# EAGLE board UI Board (EAGLE 7.5.0)
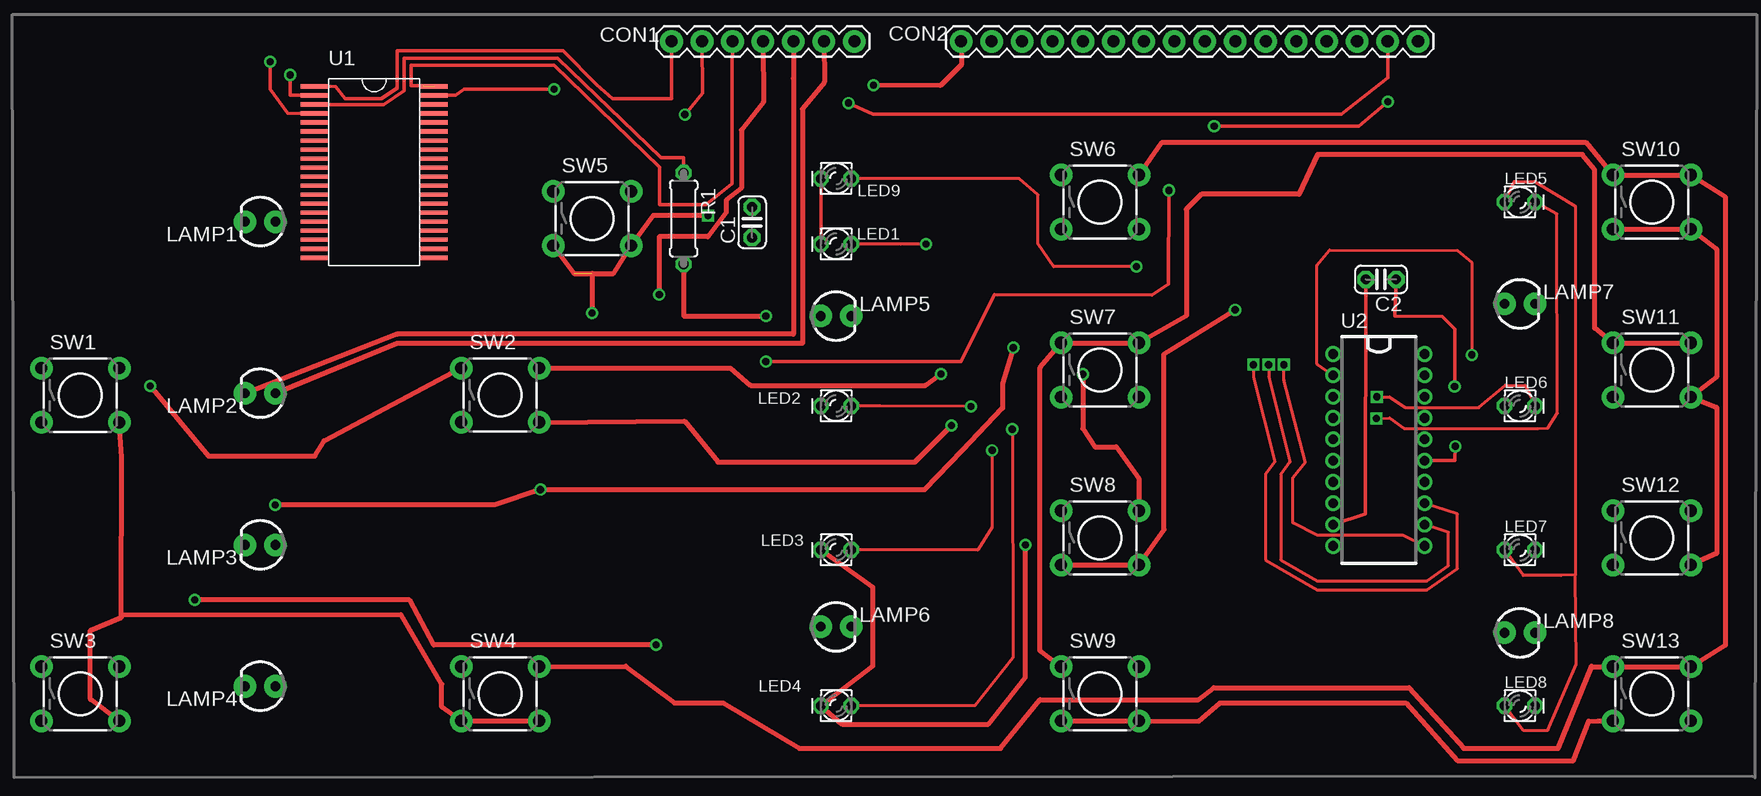
[diagram p0: board, top side]
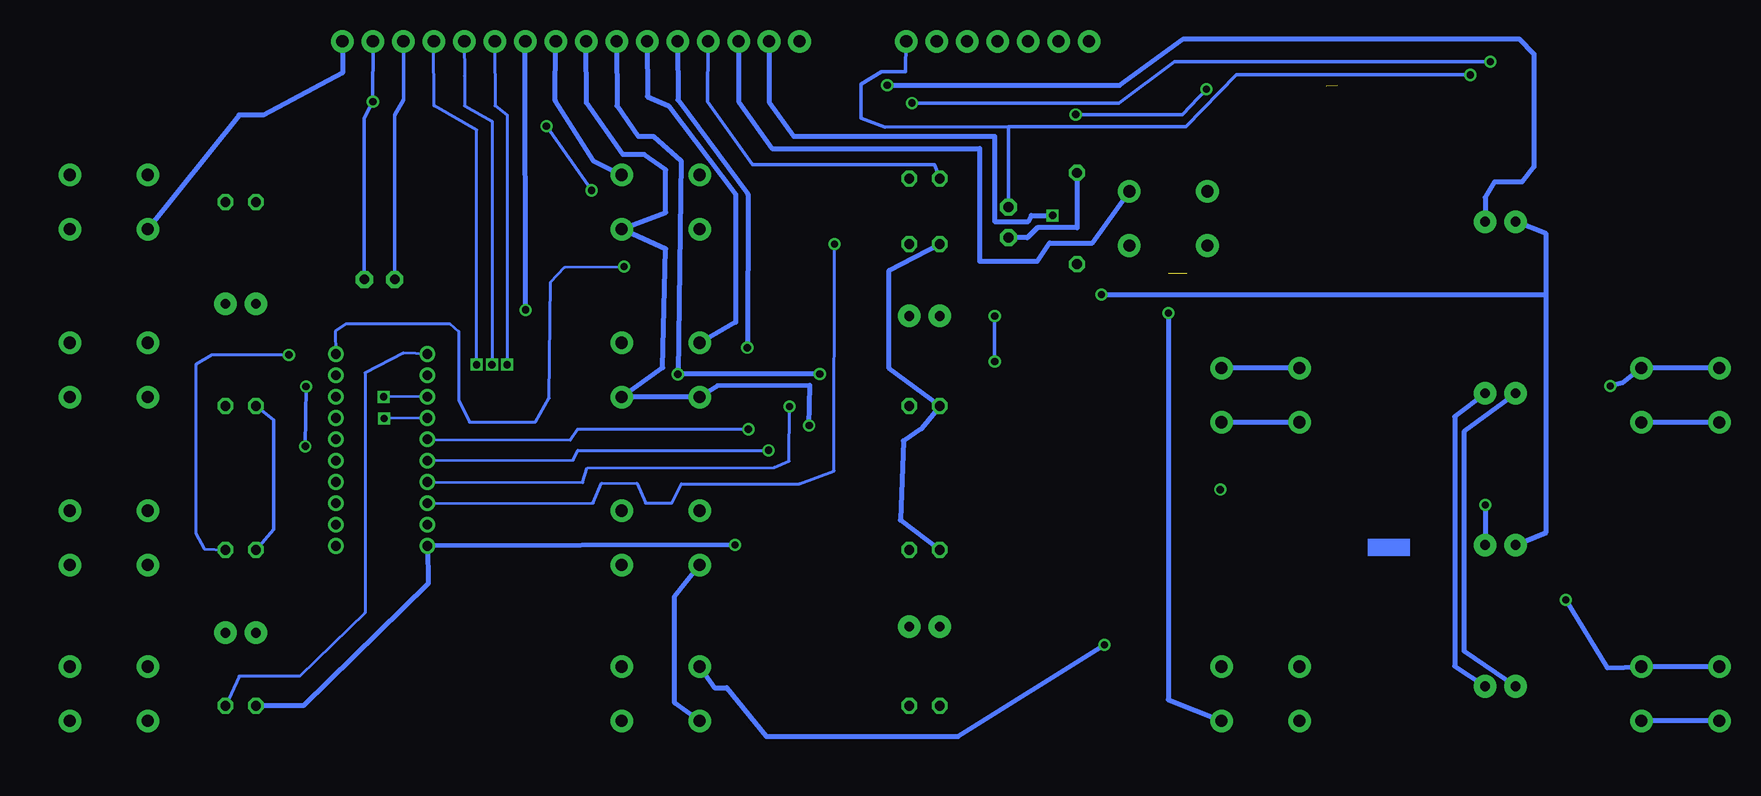
[diagram p1: board, bottom side, seen from below]

No outline drawn. Coordinates in mm, seen from the top.
Copper layers (1*16): Top 0.035mm / dielectric 1.5mm / Bottom 0.035mm
Design rules "default": minimum track width 10mil, minimum drill 24mil, track to track 8mil, track to pad 8mil, pad to pad 8mil, via to via 8mil, smd to smd 8mil, copper to edge 40mil, drill to drill 8mil, minimum pad ring 10mil, minimum via ring 8mil, stop-mask expansion 4mil, vias tented up to drill 0mil, thermal gap 10mil

## Footprints (pad centres in the part's own frame; a part is rotated, then mirrored left to right if it is on the bottom)
C025-024X044 = drill 0.813 pad 1.422 octagon: 1 -1.27,0; 2 1.27,0
1X07 = drill 1.016 pad 1.88: 1 0,0; 2 2.54,0; 3 5.08,0; 4 7.62,0; 5 10.16,0; 6 12.7,0; 7 15.24,0
1X16 = drill 1.016 pad 1.88: 1 0,0; 2 2.54,0; 3 5.08,0; 4 7.62,0; 5 10.16,0; 6 12.7,0; 7 15.24,0; 8 17.78,0; 9 20.32,0; 10 22.86,0; 11 25.4,0; 12 27.94,0; 13 30.48,0; 14 33.02,0; 15 35.56,0; 16 38.1,0
LED3MM = drill 0.813 pad 1.88: A -1.27,0; K 1.27,0
LED_LD260 = drill 0.813 octagon: A -1.27,0; K 1.27,0
LD260 = drill 0.813 octagon: A -1.27,0; K 1.27,0
0207/7 = drill 0.813 octagon: 1 -3.81,0; 2 3.81,0
TACTILE-PTH = drill 1.016 pad 1.88: 1 -3.251,2.261; 2 3.251,2.261; 3 -3.251,-2.261; 4 3.251,-2.261
SOT158-1 = smd 2.25 x 0.35: P1 -5,7.144; P2 -5,6.392; P3 -5,5.64; P4 -5,4.888; P5 -5,4.136; P6 -5,3.384; P7 -5,2.632; P8 -5,1.88; P9 -5,1.128; P10 -5,0.376; P11 -5,-0.376; P12 -5,-1.128; P13 -5,-1.88; P14 -5,-2.632; P15 -5,-3.384; P16 -5,-4.136; P17 -5,-4.888; P18 -5,-5.64; P19 -5,-6.392; P20 -5,-7.144; P21 5,-7.144; P22 5,-6.392; P23 5,-5.64; P24 5,-4.888; P25 5,-4.136; P26 5,-3.384; P27 5,-2.632; P28 5,-1.88; P29 5,-1.128; P30 5,-0.376; P31 5,0.376; P32 5,1.128; P33 5,1.88; P34 5,2.632; P35 5,3.384; P36 5,4.136; P37 5,4.888; P38 5,5.64; P39 5,6.392; P40 5,7.144
PRDP0020BA-A = drill 0.8 pad 1.27: 1 -8.001,-3.81; 2 -6.223,-3.81; 3 -4.445,-3.81; 4 -2.667,-3.81; 5 -0.889,-3.81; 6 0.889,-3.81; 7 2.667,-3.81; 8 4.445,-3.81; 9 6.223,-3.81; 10 8.001,-3.81; 11 8.001,3.81; 12 6.223,3.81; 13 4.445,3.81; 14 2.667,3.81; 15 0.889,3.81; 16 -0.889,3.81; 17 -2.667,3.81; 18 -4.445,3.81; 19 -6.223,3.81; 20 -8.001,3.81

## Placement (x,y rotation side)
C1  1.5nF  [C025-024X044]  -6.78,15.09 90 top
C2  1.5nF  [C025-024X044]  45.64,10.34 180 top
CON1  [1X07]  -13.49,30.2 0 top
CON2  [1X16]  10.64,30.2 0 top
LAMP1  LCD Temp  [LED3MM]  -47.78,15.15 180 top
LAMP2  LIGHT  [LED3MM]  -47.78,0.84 180 top
LAMP3  LCD SPEED  [LED3MM]  -47.78,-11.8 180 top
LAMP4  LIGHT  [LED3MM]  -47.78,-23.59 180 top
LAMP5  LIGHT  [LED3MM]  0.22,7.29 0 top
LAMP6  LIGHT  [LED3MM]  0.22,-18.62 0 top
LAMP7  LIGHT  [LED3MM]  57.22,8.31 0 top
LAMP8  LIGHT  [LED3MM]  57.22,-19.12 0 top
LED1  Auto  [LED_LD260]  0.22,13.29 180 top
LED2  Econ  [LD260]  0.22,-0.21 180 top
LED3  On / Off  [LD260]  0.22,-12.21 180 top
LED4  Off  [LD260]  0.22,-25.21 180 top
LED5  Windsh  [LD260]  57.22,16.79 0 top
LED6  Front  [LED_LD260]  57.22,-0.21 0 top
LED7  Front/Feet  [LD260]  57.22,-12.21 0 top
LED8  Feet  [LD260]  57.22,-25.21 0 top
LED9  On  [LD260]  0.22,18.75 180 top
R1  1M  [0207/7]  -12.49,15.42 270 top
SW1  < Temp  [TACTILE-PTH]  -62.78,0.68 0 top
SW2  Temp >  [TACTILE-PTH]  -27.78,0.69 0 top
SW3  < SPEED  [TACTILE-PTH]  -62.78,-24.21 0 top
SW4  SPEED >  [TACTILE-PTH]  -27.78,-24.21 0 top
SW5  Ext.  [TACTILE-PTH]  -20.11,15.42 0 top
SW6  Auto  [TACTILE-PTH]  22.22,16.79 0 top
SW7  Eco  [TACTILE-PTH]  22.22,2.79 0 top
SW8  Rec  [TACTILE-PTH]  22.22,-11.21 0 top
SW9  On/Off  [TACTILE-PTH]  22.22,-24.21 0 top
SW10  WindSh.  [TACTILE-PTH]  68.22,16.79 0 top
SW11  Front  [TACTILE-PTH]  68.22,2.79 0 top
SW12  Front+Feet  [TACTILE-PTH]  68.22,-11.21 0 top
SW13  Feet  [TACTILE-PTH]  68.22,-24.21 0 top
U1  PCF2112CT  [SOT158-1]  -38.28,19.29 0 top
U2  MM5481N  [PRDP0020BA-A]  45.46,-3.88 270 top

## Library data of the parts
C1 C2 LED2-LED5 LED7-LED9 R1 = adafruit
CON1 CON2 = SparkFun-Connectors
LAMP1-LAMP8 = SparkFun-LED
LED1 LED6 = eagle-ltspice
SW1-SW13 = SparkFun-Electromechanical
U1 = SOT185-1
U2 = micro-renesas

## Nets
CON3.1(GN)-(LUZ_PPL_V+): CON1.5 LAMP2.K LAMP4.K
CON3.1(GN)-T3.COLLECTOR-MM5481.BRIGHT_CONTROL(LUZ_PPL_V+): C2.2 CON2.14 U2.9
CON5.4(MN)-LUZ_PPL_V-: CON1.6 LAMP2.A LAMP4.A
CON5.11(NZ)-L4947PD(U2).GND: C2.1 CON2.15 R1.2 U1.P4 U2.15
L4947PD(U2).VOUT(+5V): CON2.4 LED1.K LED2.K LED3.K LED4.K LED5.A LED6.A LED7.A LED8.A LED9.K U2.10
LUZ_LCD_V+: CON1.4 LAMP1.K LAMP3.K
MM5481.LED1: LED1.A U2.8
MM5481.LED2: LED2.A U2.7
MM5481.LED3: LED3.A U2.6
MM5481.LED4: LED4.A U2.5
MM5481.LED5: LED5.K U2.4
MM5481.LED6: LED6.K U2.3
MM5481.LED7: LED7.K U2.2
MM5481.LED8: LED8.K U2.1
MM5481.LED9: LED9.A U2.20
PA0-SW1: CON2.2 SW1.3 SW1.4 SW3.3 SW3.4 SW4.3 SW4.4 SW5.3 SW5.4
PA1-SW7: CON2.10 SW8.3 SW8.4 SW9.3 SW9.4 SW13.3
PA2-SW8: CON2.16 SW10.3 SW10.4 SW11.4 SW12.4
PA3-SW5: CON2.8 SW2.3 SW2.4 SW6.4 SW7.3 SW7.4
PA4-SW4: CON2.7 SW1.1 SW1.2 SW2.1 SW2.2 SW8.2
PA5-SW3: CON2.6 SW3.1 SW3.2 SW7.1 SW7.2 SW9.1 SW11.1 SW11.2
PA6-SW6: CON2.9 SW4.2 SW6.2 SW10.1 SW10.2 SW13.1 SW13.2
PA7-SW2: CON2.3 SW5.2
PB0-PCF2112.DATA_ENABLE: CON1.3 U1.P40
PB1-PCF2112.CLOCK_BUSTER: CON1.1 U1.P1
PB2-PCF2112.DATA: CON1.2 U1.P39
PCF2112.VDD: C1.2 CON1.7 U1.P2
PF0-MM5481.DATA: CON2.12 U2.12
PF1-MM5481.CLOCK_IN: CON2.13 U2.11
PF2-MM5481.DATA_ENABLED: CON2.11 U2.13
S$1: LAMP6.K
S$36: C1.1 R1.1 U1.P3
T1.COLLECTOR(LUZ_LCD_VELOCIDAD_V-): CON2.5 LAMP3.A
T2.COLLECTOR(LUZ_LCD_TEMPERATURA_V-): CON2.1 LAMP1.A

## Tracks (layer width: path | path; a pad name or v marks a point on that pad's centre or on a via)
CON3.1(GN)-(LUZ_PPL_V+)
  Top 0.406: CON1.5 -3.35,27.1 -3.35,5.77 -36.37,5.77 LAMP2.K
  Bottom 0.406: LAMP2.K -44.75,-2.36 -44.75,-20.65 LAMP4.K
CON3.1(GN)-T3.COLLECTOR-MM5481.BRIGHT_CONTROL(LUZ_PPL_V+)
  Top 0.305: C2.2 44.35,-9.22 U2.9
  Bottom 0.305: CON2.14 43.64,25.33 44.4,24.06 C2.2
CON5.4(MN)-LUZ_PPL_V-
  Top 0.406: CON1.6 -0.75,26.8 -2.59,24.56 -2.59,5.01 -36.37,5.01 LAMP2.A
  Bottom 0.406: LAMP2.A -43.99,-1.09 -43.99,-21.92 LAMP4.A
CON5.11(NZ)-L4947PD(U2).GND  (via drill 0.6)
  Top 0.254: -12.49,10.09 -12.49,9.32
  Top 0.305: C2.1 46.79,7.29 50.75,7.25 51.78,6.19 v51.78,1.41 | v51.83,-3.58 51.78,-4.75 U2.15 | v-5.63,3.48 10.62,3.48 13.41,9.07 26.55,9.05 27.93,9.97 v27.96,17.77 | v31.73,23.12 43.8,23.1 v46.2,25.15 | -43.3,24.19 U1.P4 -45.5,24.2 -46.95,26.2 v-46.95,28.5 | CON2.15 46.2,27.15 42.35,24.1 3.3,24.1 v1.25,25.05
  Top 0.406: v-5.63,7.29 -12.49,7.29 -12.49,9.32 R1.2
  Bottom 0.305: C2.1 46.94,14.66 46.94,23.8 v46.2,25.15 CON2.15 | v51.78,1.41 v51.83,-3.58 | v-5.63,7.29 v-5.63,3.48 | v27.96,17.77 v31.73,23.12 | v1.25,25.05 -16,25.05 -20.6,28.5 v-46.95,28.5
L4947PD(U2).VOUT(+5V)  (via drill 0.6)
  Top 0.254: LED5.A 56.75,18.5 58.45,18.5 61.85,16.45 61.85,-14.3 | 61.85,-14.3 60.65,-14.35 57.5,-14.35 LED7.A | LED8.A 57.5,-27.25 59.55,-27.25 61.9,-21.75 61.85,-14.3
  Top 0.305: LED9.K LED1.K
  Top 0.406: LED3.K 3.25,-15.31 3.25,-21.92 LED4.K 0.71,-26.74 12.91,-26.74 16,-22.86 v16,-11.81
  Bottom 0.305: LED6.A 54.45,-1.4 54.45,-10.5 LED7.A | CON2.4 18.3,25.15 14.55,19.9 -0.6,19.9 LED9.K
  Bottom 0.406: LED3.K 2.24,-9.73 1.99,-3.12 0.46,-2.11 LED2.K 3.17,2.93 3.17,11.09 LED1.K | LED8.A 51.98,-25.2 41.61,-15.06 U2.10 v16,-11.81
LUZ_LCD_V+  (via drill 0.6)
  Top 0.406: CON1.4 -5.83,25.12 -7.67,22.79 -7.67,17.96 -8.94,16.94 -8.94,15.93 -10.46,13.9 -14.53,13.9 v-14.53,9.07
  Bottom 0.406: v-14.53,9.07 -51.61,9.07 | -51.61,9.07 -51.61,14.15 LAMP1.K | LAMP3.K -51.61,-10.74 -51.61,9.07
MM5481.LED1  (via drill 0.6)
  Top 0.254: v7.72,13.29 5.67,13.29 5.6,13.27 LED1.A
  Bottom 0.254: U2.8 27.83,-8.3 27.13,-6.65 24.18,-6.65 23.47,-8.32 21.26,-8.3 20.48,-6.71 10.66,-6.71 7.76,-5.63 v7.72,13.29
MM5481.LED2  (via drill 0.6)
  Top 0.254: v11.47,-0.25 3.91,-0.2 LED2.A
  Bottom 0.254: U2.7 28.7,-6.6 28.34,-5.38 12.74,-5.33 11.5,-4.8 v11.47,-0.25
MM5481.LED3  (via drill 0.6)
  Top 0.254: v13.22,-3.91 13.22,-10.36 12.04,-12.21 LED3.A
  Bottom 0.254: U2.6 29.5,-4.73 29.11,-3.91 v13.22,-3.91
MM5481.LED4  (via drill 0.6)
  Top 0.254: v14.9,-2.15 14.95,-21.2 11.8,-25.2 LED4.A
  Bottom 0.254: U2.5 29.75,-3.05 29.15,-2.15 v14.9,-2.15
MM5481.LED5  (via drill 0.6)
  Top 0.254: v45.25,-1.25 46.35,-1.2 47.55,-2.1 58.75,-2.1 59.55,-2.05 60.35,-0.8 60.3,15.8 LED5.K
  Bottom 0.254: U2.4 v45.25,-1.25
MM5481.LED6  (via drill 0.6)
  Top 0.254: v45.3,0.55 46.35,0.55 47.65,-0.35 53.8,-0.35 56,1.5 57.65,1.5 LED6.K
  Bottom 0.254: U2.3 v45.3,0.55
MM5481.LED7  (via drill 0.6)
  Top 0.254: U2.2 40.3,3.3 40.3,11.55 41.35,12.8 52,12.75 53.2,11.75 v53.2,4.05
  Bottom 0.254: v53.2,4.05 59.65,4.05 60.95,3.25 60.95,-10.85 60.25,-12.15 LED7.K
MM5481.LED8
  Bottom 0.254: U2.1 43.65,4.2 46.85,2.55 46.85,-17.45 52.3,-22.75 57.35,-22.75 LED8.K
MM5481.LED9  (via drill 0.6)
  Top 0.254: v25.25,11.4 18.35,11.4 17.05,13.3 17.05,17.4 15.5,18.75 LED9.A
  Bottom 0.254: U2.20 49.3,6.05 48.4,6.65 39.8,6.65 39.05,6 39.05,0.25 38.15,-1.55 32.65,-1.55 31.5,0.45 31.4,10.1 30.2,11.35 v25.25,11.4
PA0-SW1  (via drill 0.6)  (1 unrouted)
  Top 0.406: v-10.46,15.67 -15.03,15.67 SW5.4 -18.34,10.85 -21.64,10.85 SW5.3 | -20.11,10.85 v-20.11,7.55 | SW3.4 -61.91,-24.69 -61.95,-24.63 -61.95,-18.93 -59.37,-17.82 -59.37,-17.68 | -59.37,-17.68 -59.33,-4.47 SW1.4 | -59.37,-17.68 -36.05,-17.61 -32.66,-23.4 -32.66,-25.31 SW4.3 SW4.4
  Bottom 0.406: CON2.2 13.16,25.12 11.13,22.28 -5.63,22.28 -5.63,15.17 -8.43,15.17 -8.68,15.67 v-10.46,15.67 | v-20.11,7.55 -20.11,-24.71 SW4.4 | SW3.3 SW3.4 | SW1.3 SW1.4
PA1-SW7  (via drill 0.6)
  Top 0.406: SW9.3 SW9.4 30.43,-26.49 32.21,-24.97 47.7,-24.97 52.02,-29.79 61.67,-29.79 62.95,-26.49 63.73,-26.47 SW13.3 | SW8.3 SW8.4 27.56,-10.54 27.56,4.1 v33.48,7.8
  Bottom 0.406: v33.48,7.8 CON2.10 | SW9.3 21.04,-24.97 21.04,-16.08 SW8.3
PA2-SW8
  Top 0.406: SW12.4 73.61,-12.52 73.61,-0.33 SW11.4 73.61,2.21 73.61,12.88 SW10.4 SW10.3
  Bottom 0.406: CON2.16 48.72,27.56 55.33,24.06 57.36,24.06 SW10.3
PA3-SW5  (via drill 0.6)
  Top 0.406: SW2.4 -12.42,-1.47 -9.63,-4.9 6.79,-4.9 v9.83,-1.84
  Bottom 0.406: CON2.8 28.4,25.07 25.35,20.75 23.57,20.75 21.8,19.48 21.8,15.93 SW6.4 21.8,12.88 22.05,2.97 SW7.4 SW7.3 17.47,1.47 9.76,1.5 v9.83,-1.84 | SW2.3 SW2.4
PA4-SW4  (via drill 0.6)
  Top 0.406: v20.78,2.43 20.78,-2.11 21.8,-3.63 23.57,-3.63 25.44,-6.25 SW8.2 | v-56.94,1.45 -52.12,-4.39 -43.23,-4.39 -42.47,-3.12 SW2.1 | SW2.2 -8.6,2.95 -6.9,1.5 7.65,1.5 v8.95,2.45
  Bottom 0.406: CON2.7 25.86,24.82 24.08,22.28 22.81,22.28 20.53,20.25 20.76,2.46 | 20.76,2.46 v20.78,2.43 | SW1.1 SW1.2 -57.96,1.7 v-56.94,1.45 | SW2.1 SW2.2 | v8.95,2.45 20.76,2.46
PA5-SW3  (via drill 0.6)
  Top 0.406: SW9.1 17.23,-20.65 17.23,2.97 SW7.1 SW7.2 29.42,7.29 29.42,16.18 30.69,17.45 38.81,17.45 40.34,20.75 62.44,20.75 63.45,19.48 63.45,6.28 SW11.1 SW11.2 | v-14.78,-20.14 -33.32,-20.14 -35.35,-16.39 v-53.24,-16.39
  Bottom 0.406: SW9.1 17.73,-23.7 16.72,-23.7 13.41,-27.76 -2.59,-27.76 v-14.78,-20.14 | v-53.24,-16.39 -56.68,-22.03 SW3.2 SW3.1 | CON2.6 23.32,25.58 21.54,24.82 15.96,17.45 15.96,6.78 SW7.1
PA6-SW6
  Top 0.406: SW6.2 27.39,21.77 62.69,21.77 SW10.1 SW10.2 74.38,17.2 74.38,-20.14 SW13.2 SW13.1 63.17,-21.95 63.2,-21.92 60.41,-28.78 52.54,-28.78 47.97,-23.7 31.7,-23.7 30.43,-24.71 17.23,-24.71 13.92,-28.78 -2.84,-28.78 -9.19,-24.97 -13.26,-24.97 -17.32,-21.92 SW4.2
  Bottom 0.406: SW6.2 27.81,20.21 31.01,25.26 CON2.9
PA7-SW2
  Bottom 0.406: CON2.3 15.7,25.17 12.91,21.26 -4.37,21.26 -4.37,11.86 -9.19,11.86 -10.21,13.39 -13.76,13.39 SW5.2
PB0-PCF2112.DATA_ENABLE  (1 unrouted)
  Top 0.305: CON1.3 -8.44,27.55 -8.44,18.33 -10.63,16.56 -14.48,16.56 -14.48,19.69 -23.29,28.19 -35.19,28.19 -35.19,26.49 -34.19,26.49
PB1-PCF2112.CLOCK_BUSTER
  Top 0.305: -43.24,26.39 U1.P1 -41.48,26.39 -40.69,25.39 -37.69,25.39 -36.38,26.29 -36.38,29.39 -22.53,29.39 -19.73,26.59 -18.43,25.39 -13.48,25.39 CON1.1
PB2-PCF2112.DATA  (via drill 0.6)
  Top 0.305: U1.P39 -31.48,25.69 -30.79,26.19 v-23.29,26.19 | v-12.38,24.09 -10.9,25.87 CON1.2
  Bottom 0.305: v-23.29,26.19 -21.29,24.09 v-12.38,24.09
PCF2112.VDD  (via drill 0.6)
  Top 0.305: -43.29,25.69 U1.P2 -45.28,25.69 v-45.28,27.39
  Bottom 0.305: v-45.28,27.39 -25.79,27.39 -21.59,23.09 -6.79,23.09 | -6.79,23.09 3.5,23.05 5.51,23.79 5.52,26.62 3.8,27.65 1.8,27.65 CON1.7 | C1.2 -6.79,23.09
PF0-MM5481.DATA  (via drill 0.6)
  Top 0.254: v36.27,3.23 36.27,2.21 38.05,-4.9 37.29,-5.92 37.29,-13.03 40.34,-14.81 49.48,-14.81 51.26,-13.54 51.26,-10.74 U2.12
  Bottom 0.254: CON2.12 38.56,27.33 38.56,24.82 36.27,23.55 v36.27,3.23
PF1-MM5481.CLOCK_IN  (via drill 0.6)
  Top 0.254: U2.11 47.45,-11 40.34,-11 38.31,-9.98 38.31,-6.17 39.32,-4.9 37.55,1.96 v37.55,3.23
  Bottom 0.254: v37.55,3.23 37.55,22.79 41.1,24.82 CON2.13
PF2-MM5481.DATA_ENABLED  (via drill 0.6)
  Top 0.254: v35.01,3.23 35.01,2.21 36.78,-4.9 36.02,-5.92 36.02,-13.03 40.34,-15.57 49.48,-15.57 52.02,-13.79 52.02,-9.22 U2.13
  Bottom 0.254: CON2.11 36.02,24.82 35.01,24.06 v35.01,3.23
S$36
  Top 0.305: U1.P3 -43.24,24.89 -37.48,24.89 -35.78,26.09 -35.78,28.79 -22.98,28.79 -14.38,20.48 -12.48,20.5 R1.1
  Top 0.406: R1.1
  Bottom 0.406: R1.1 -12.49,14.66 -9.19,14.66 -8.35,13.82 C1.1
T1.COLLECTOR(LUZ_LCD_VELOCIDAD_V-)  (via drill 0.6)
  Top 0.406: v14.99,4.65 14.1,1.65 14.09,0.55 14.1,0.5 14.1,-0.4 10.74,-3.9 7.62,-7.19 v-24.43,-7.19 -28.24,-8.46 v-46.53,-8.46
  Bottom 0.406: CON2.5 20.78,25.33 14.94,17.45 v14.99,4.65 | v-46.53,-8.46 LAMP3.A
T2.COLLECTOR(LUZ_LCD_TEMPERATURA_V-)  (via drill 0.6)
  Top 0.406: CON2.1 10.65,28.23 8.9,26.5 v3.33,26.53
  Bottom 0.406: v3.33,26.53 -16.05,26.53 -21.38,30.41 -49.32,30.41 -50.59,29.14 -50.59,19.74 -49.58,18.47 -47.29,18.47 -46.53,17.2 LAMP1.A
(copper drawn outside any net)
  shapes: Bottom area x1

## Text on the board
tDocu: 1 | 2 | 3 | 4 | 5 | 6 | 7 | 1 | 2 | 3 | 4 | 5 | 6 | 7 | 8 | 9 | 10 | 11 | 12 | 13 | 14 | 15 | 16